# Altium PCB PCB1.PcbDoc
Units mil, origin at the board's own origin, x right, y up, seen from the top; angles counter-clockwise.
Board outline 3942.06 x 5904.05 mil, 2 copper layers (Top Layer, Bottom Layer); 24 components, 64 nets, 315 pads, 153 vias.
Unrouted connection lines stored in the file: 55.
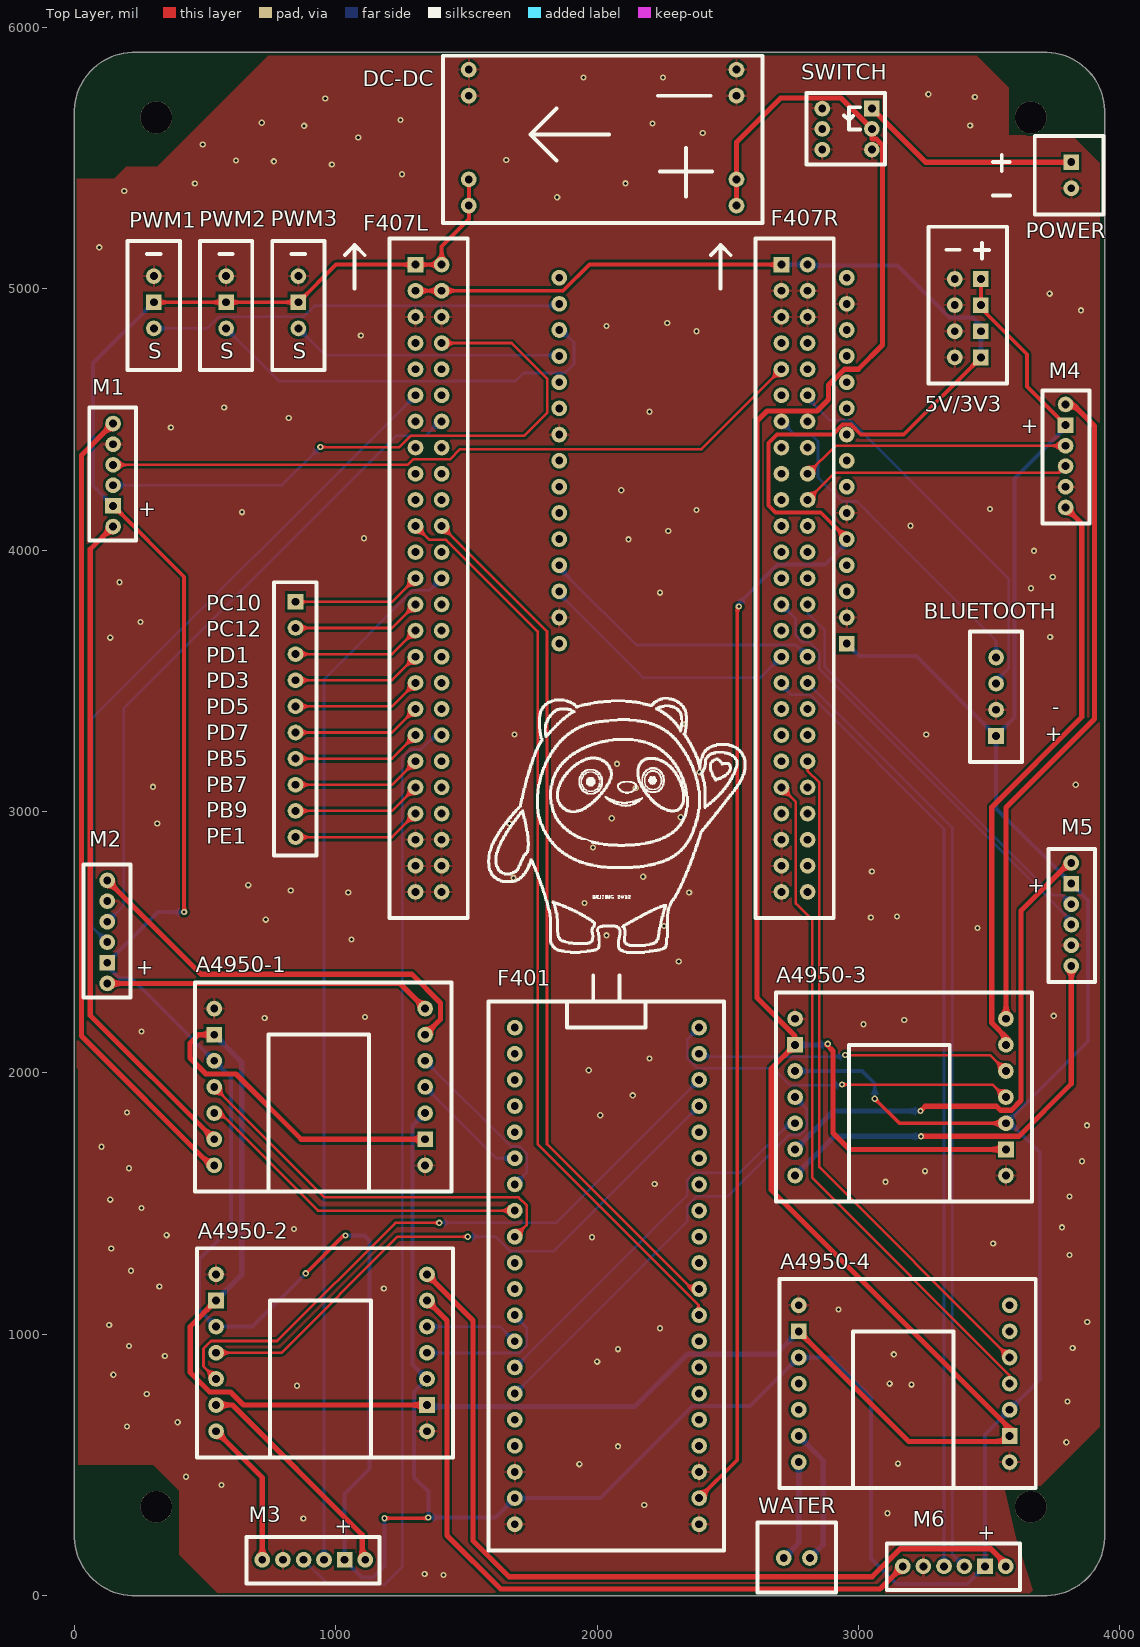
[diagram p0: Top Layer view]
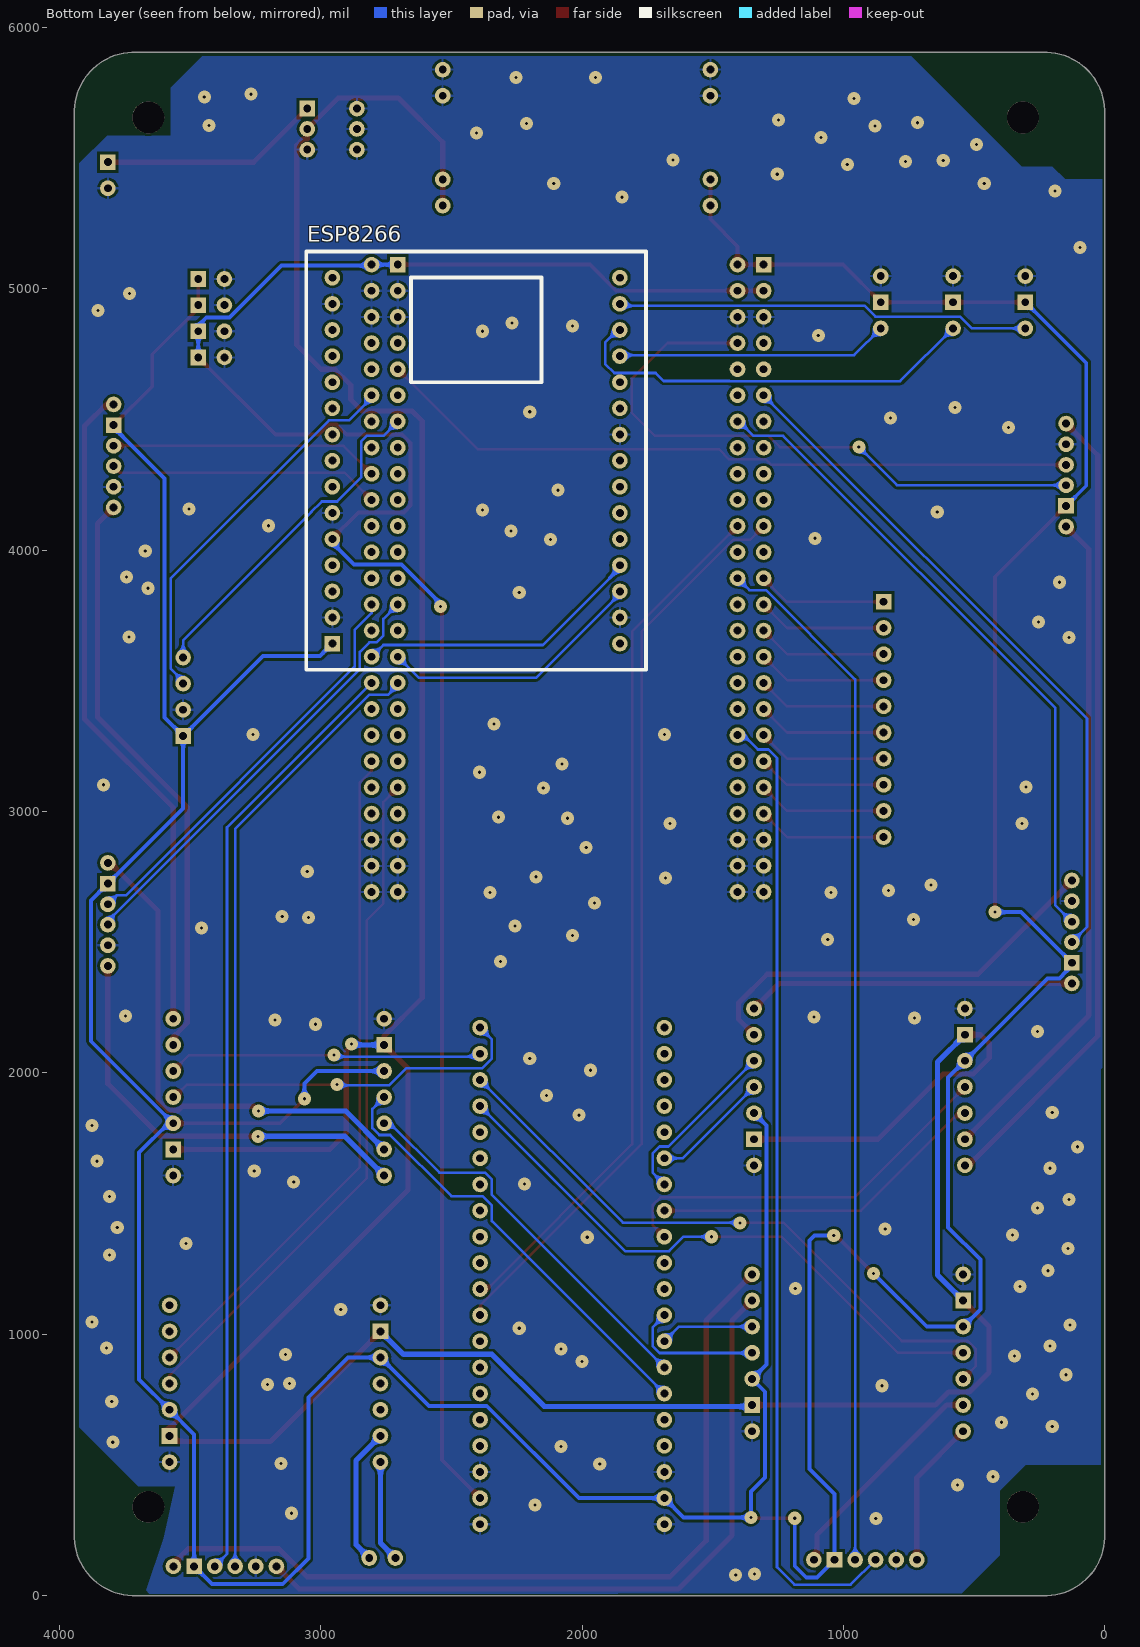
[diagram p1: Bottom Layer view, seen from below]

## Layer stack, top to bottom
Top Solder: solder mask 0.4, Solder Resist, Dk 3.5
Top Layer: signal copper 1.4
Dielectric 1: dielectric 12.6, FR-4, Dk 4.8
Bottom Layer: signal copper 1.4
Bottom Solder: solder mask 0.4, Solder Resist, Dk 3.5

## Board outline
220,0 cw(c228.5,228.5) 0,237 0,236.11 0,5684 cw(c228.5,5675.5) 237,5904 3722.01,5904 cw(c3713.51,5675.5) 3942.01,5667 3942.01,5666 3942.01,219 3942,220 cw(c3713.5,228.5) 3705,0

## Design rules (kind name [scope] priority, off if disabled: settings)
Clearance [All] p1: gap=10 ignorepadtopadclearanceinfootprint=FALSE except(0.25: Arc-Arc Arc-Track Arc-SMDPad Arc-THPad Arc-Via Arc-Text Arc-Hole Track-Track Track-SMDPad Track-THPad Track-Via Track-Text Track-Hole SMDPad-SMDPad SMDPad-THPad SMDPad-Via SMDPad-Text SMDPad-Hole THPad-THPad THPad-Via THPad-Text THPad-Hole Via-Via Via-Text Via-Hole Text-Text Text-Hole)
HoleSize [All] p1: absolutevalues=TRUE maxlimit=130 minlimit=1 maxpercent=80.000 minpercent=20.000
PolygonConnect [All] p1: thpad.connectstyle=Relief thpad.reliefconductorwidth=10 thpad.reliefentries=4 thpad.polygonreliefangle="90 Angle" thpad.airgapwidth=10 smdpad.connectstyle=Relief smdpad.reliefconductorwidth=10 smdpad.reliefentries=4 smdpad.polygonreliefangle="90 Angle" smdpad.airgapwidth=10 via.connectstyle=Direct via.reliefconductorwidth=10 via.reliefentries=4 via.polygonreliefangle="90 Angle" via.airgapwidth=10
RoutingVias [All] p1: holewidth=28 width=50 viastyle="Through Hole" minholewidth=28 minwidth=50 maxholewidth=28 maxwidth=50
SilkToSolderMaskClearance [IsPad] p1: minsilkscreentomaskgap=7 clearancetoexposedcopper=TRUE
SolderMaskExpansion [All] p1: expansion=4
Width Width_4 [All] p1: maxlimit=20 minlimit=10 preferedwidth=10
Width Width_3 [InNet('3V3')] p2: maxlimit=15 minlimit=10 preferedwidth=15
Width Width_2 [InNet('5V')] p3: maxlimit=15 minlimit=15 preferedwidth=15
Width Width_1 [InNet('12V')] p4: maxlimit=20 minlimit=10 preferedwidth=20
Width [InNet('12V_IN')] p5: maxlimit=20 minlimit=10 preferedwidth=20
28 further rules are at their usual default settings.

## Classes and differential pairs
component class Sheet1: DC-DC POWER SWITCH

## Components (designator, comment, footprint, x,y, rotation, side; value= is the part's Value field where it differs from the comment)
*1 "PIN_HEADER" PIN_HEADER -9460,-15590 r0 top
*2 "POWER_HEADER" POWER_HEADER 3468,5137 r0 top
A4950-1 "A4950" A4950 962,2191 r180 top (schematic designator *5)
A4950-2 "A4950" A4950 969,1174 r180 top (schematic designator *6)
A4950-3 "A4950" A4950 3184,2152 r180 top (schematic designator *7)
A4950-4 "A4950" A4950 3198,1056 r180 top (schematic designator *8)
BLUETOOTH "HC-06" HC-06 3718,3582 r180 top (schematic designator *11)
DC-DC "DC-DC" DC-DC 1902,5412 r180 top (schematic designator *9)
ESP8266 "ESP8266" ESP 1894,3008 r180 bottom (schematic designator *22)
F401 "STM32F401" STM32F401CCU6 2290,273 r0 top (schematic designator *21)
F407L "STM32F407左" STM32F407左 1305,3992 r0 top (schematic designator *19)
F407R "STM32F407右" STM32F407左 2705,3992 r0 top locked (schematic designator *18)
M1 "ENCODER1" ENCODER1 148,4090 r0 top (schematic designator *15)
M2 "ENCODER2" ENCODER1 126,2342 r0 top (schematic designator *16)
M3 "ENCODER3" ENCODER1 1113,137 r90 top (schematic designator *17)
M4 "ENCODER4" ENCODER2 3813,4155 r0 top (schematic designator *12)
M5 "ENCODER5" ENCODER2 3835,2401 r0 top (schematic designator *13)
M6 "ENCODER6" ENCODER2 3161,91 r270 top (schematic designator *14)
POWER "POWER" POWER 3814,5384 r0 top (schematic designator *10)
PWM1 "PWM1" PWM 1004,3548 r0 top (schematic designator *20)
PWM2 "PWM2" PWM 1280.5,3548 r0 top (schematic designator *23)
PWM3 "PWM3" PWM 1557,3548 r0 top (schematic designator *24)
SWITCH "SWITCH" SIWITCH 2951,5689 r0 top (schematic designator *3)
WATER "WATER_MOTER" WATER_HEADER 2814,144 r90 top (schematic designator *4)

## Footprints (in the part's own frame and the unit in brackets; to place one, negate y for a bottom-side part, rotate by r counter-clockwise, add the part's x,y. Pads: shape width x height; smd on the part's side, far side on the other; paste and mask are expansions set on the pad)
A4950 [mil]
  round 60 hole 30: 1(-380,545) 3(-380,345) 4(-380,245) 5(-380,145) 6(-380,45) 7(-380,-55) 8(427,545) 9(427,445) 10(427,345) 11(427,245) 12(427,145) 14(427,-55)
  rect 60x60 hole 30: 2(-380,445) 13(427,45)
  silkscreen extent -480,-155 500,645
DC-DC [mil]
  round 60 hole 30: 1(-631,-426) 2(-631,-326) 3(-631,-6) 4(-631,94) 5(393,-426) 6(393,-326) 7(393,-6) 8(393,94)
  silkscreen extent -731,-479 492,160
ENCODER1 [mil]
  round 60 hole 30: 1(0,394) 2(0,315) 3(0,236) 4(0,158) 6(0,0)
  rect 60x60 hole 30: 5(0,79)
  silkscreen extent -91,-54 88,455
ENCODER2 [mil]
  round 60 hole 30: 1(-21,8) 2(-21,87) 3(-21,166) 4(-21,244) 6(-21,402)
  rect 60x60 hole 30: 5(-21,323)
  silkscreen extent -109,-53 70,456
ESP [mil]
  round 60 hole 30: 1(-1061,2034) 2(-1061,1934) 3(-1061,1834) 4(-1061,1734) 5(-1061,1634) 6(-1061,1534) 7(-1061,1434) 8(-1061,1334) 9(-1061,1234) 10(-1061,1134) 11(-1061,1034) 12(-1061,934) 13(-1061,834) 14(-1061,734) 16(39,2034) 17(39,1934) 18(39,1834) 19(39,1734) 20(39,1634) 21(39,1534) 22(39,1434) 23(39,1334) 24(39,1234) 25(39,1134) 26(39,1034) 27(39,934) 28(39,834) 29(39,734) 30(39,634)
  rect 60x60 hole 30: 15(-1061,634)
  silkscreen extent -1161,534 139,2134
HC-06 [mil]
  round 60 hole 30: 1(192,-7) 2(192,93) 3(192,193)
  rect 60x60 hole 30: 4(192,293)
  silkscreen extent 92,-107 292,393
PIN_HEADER [mil]
  rect 60x60 hole 30: 1(10306,19392)
  round 60 hole 30: 2(10306,19292) 3(10306,19192) 4(10306,19092) 5(10306,18992) 6(10306,18892) 7(10306,18792) 8(10306,18692) 9(10306,18592) 10(10306,18492)
  silkscreen extent 10224,18422 10386,19467
POWER [mil]
  rect 60x60 hole 30: 1(0,100)
  round 60 hole 30: 2(0,0)
  silkscreen extent -300,-100 123,200
POWER_HEADER [mil]
  rect 60x60 hole 30: 1(0,-100) 2(0,-200) 3(0,-300) 4(0,-400)
  round 60 hole 30: 5(-100,-100) 6(-100,-200) 7(-100,-300) 8(-100,-400)
  silkscreen extent -200,-500 100,100
PWM [mil]
  round 60 hole 30: 1(-700,1500) 3(-700,1300)
  rect 60x60 hole 30: 2(-700,1400)
  silkscreen extent -800,1141 -600,1634
SIWITCH [mil]
  rect 60x60 hole 30: 1(100,0)
  round 60 hole 30: 2(100,-78) 3(100,-157) 4(-90,0) 5(-90,-78) 6(-90,-157)
  silkscreen extent -150,-214 150,60
STM32F401CCU6 [mil]
  round 60 hole 30: 1(-605,1900) 2(-605,1800) 3(-605,1700) 4(-605,1600) 5(-605,1500) 6(-605,1400) 7(-605,1300) 8(-605,1200) 9(-605,1100) 10(-605,1000) 11(-605,900) 12(-605,800) 13(-605,700) 14(-605,600) 15(-605,500) 16(-605,400) 17(-605,300) 18(-605,200) 19(-605,100) 20(-605,0) 21(100,1900) 22(100,1800) 23(100,1700) 24(100,1600) 25(100,1500) 26(100,1400) 27(100,1300) 28(100,1200) 29(100,1100) 30(100,1000) 31(100,900) 32(100,800) 33(100,700) 34(100,600) 35(100,500) 36(100,400) 37(100,300) 38(100,200) 39(100,100) 40(100,0)
  silkscreen extent -705,-100 195,2100
STM32F407左 [mil]
  rect 60x60 hole 30: 1(0,1100)
  round 60 hole 30: 2(0,1000) 3(0,900) 4(0,800) 5(0,700) 6(0,600) 7(0,500) 8(0,400) 9(0,300) 10(0,200) 11(0,100) 12(0,0) 13(0,-100) 14(0,-200) 15(0,-300) 16(0,-400) 17(0,-500) 18(0,-600) 19(0,-700) 20(0,-800) 21(0,-900) 22(0,-1000) 23(100,1100) 24(100,1000) 25(100,900) 26(100,800) 27(100,700) 28(100,600) 29(100,500) 30(100,400) 31(100,300) 32(100,200) 33(100,100) 34(100,0) 35(100,-100) 36(100,-200) 37(100,-300) 38(100,-400) 39(100,-500) 40(100,-600) 41(100,-700) 42(100,-800) 43(100,-900) 44(100,-1000) 45(0,-1100) 46(0,-1200) 47(0,-1300) 48(100,-1100) 49(100,-1200) 50(100,-1300)
  silkscreen extent -270,-1400 200,1200
WATER_HEADER [mil]
  round 60 hole 30: 1(0,100) 2(0,0)
  silkscreen extent -132,-100 135,200

## Free pads (board coordinates)
  round 122 hole 122: 75(313,340) 75(313,5655) 75(3659,340) 75(3659,5655)

## Via types
v1: diameter 24/50 (per signal layer), hole 12, Top Layer to Bottom Layer, 153 vias

## Nets (pads, with @x,y where several pads share a name; then routed paths per layer and width w, separated by ;. In a path a pad name is that pad's centre, name@x,y a point inside that pad or via, vN(x,y) a via of type N, cw(c..) or ccw(c..) an arc to the next point about the centre after c; other vN are vias at no path point)
3V3: *2.3 *2.4 ESP8266.11 F401.39 F407L.2 F407L.24 F407R.1 F407R.23 | length 7991
  Top Layer w15: F407L.2 F407L.24 1870,4992 1970,5092 F407R.1 ; F401.39 2536,519 v1@2536,3784 ; ESP8266.11@2964,4036 2855.5,4144.5 2681.5,4144.5 2656,4170 2656,4410.18 2687.82,4442 2901.61,4442 2939.36,4479.75 2970.64,4479.75 3008.39,4442 3173,4442 *2.4
  Bottom Layer w15: v1@2534,3788.18 2690.32,3944.5 2872.5,3944.5 ESP8266.11@2951,4023 ; F407R.1 F407R.23 2809,5088 3149.82,5088 3348.32,4889.5 3437.5,4889.5 3468,4859 *2.3 *2.4
  other v1: 2542,3784
5V: *2.1 *2.2 A4950-1.3 A4950-1.12 A4950-2.3 A4950-2.12 A4950-3.3 A4950-3.12 A4950-4.3 A4950-4.12 BLUETOOTH.4 DC-DC.7 DC-DC.8 ESP8266.15 F401.19 F407L.1 F407L.23 M1.5 M2.5 M3.5 M4.5 M5.5 M6.5 PWM1.2 PWM2.2 PWM3.2 | length 20760.1
  Top Layer w15: M1.5 149,4169 420,3898 v1(420,2615) ; PWM1.2 PWM2.2 PWM3.2 1001,5092 F407L.1 F407L.23 1405,5162 1509,5266 DC-DC.8 DC-DC.7 ; v1(885,1233) v1@1027,1375 ; v1(1186,296) 1351,296 v1(1354,299) ; A4950-1.3 A4950-1.3@1345.5,1842.5 ; v1(3062,1901) 3156,1807 A4950-3.3 ; *2.1 *2.2 3462,4931 3644,4749 3644,4626 M4.5
  Bottom Layer w15: M2.5 126,2408 144.5,2389.5 145.68,2389.5 173.5,2361.68 219.32,2361.68 A4950-1.12 599,1982 599,1409 476,1286 476,1095 A4950-2.12 681,1029 v1(885,1233) ; M2.5@127,2422 320,2615 v1(420,2615) ; M1.5 71,4246 71,4715 PWM1.2 ; v1(1037,1378) 1110,1378 1129,1359 1129,484 1034,389 M3.5 1101,70 1142,70 1186,114 v1(1186,296) v1@1182,296 ; A4950-1.3 1294,1798 1294,884 A4950-2.3 1300,780 1300,452 1354,398 v1(1354,299) 1611,299 F401.19 ; F401.19@1675,383 F401.19 ; A4950-3.12 3014,2007 3062,1959 v1(3062,1901) ; ESP8266.15 3003,3594 3221,3594 BLUETOOTH.4 ; M4.5@3792,4498 M4.5 3792,4469 3596.5,4273.5 3596.5,3359.5 BLUETOOTH.4 ; F401.19 2012,373 2364.5,725.5 2585.5,725.5 A4950-4.12 2895,911 3047,759 3047,142 3145,44 3416,44 M6.5 3484,617 A4950-4.3 3694,827 3694,1695 3582,1807 A4950-3.3 3878,2121 3878,2660 M5.5 3526,3012 BLUETOOTH.4
12V: A4950-1.2 A4950-1.13 A4950-2.2 A4950-2.13 A4950-3.2 A4950-3.13 A4950-4.2 A4950-4.13 DC-DC.3 DC-DC.4 SWITCH.2 | length 13965.3
  Top Layer w20: A4950-1.13 475,2146 442,2113 442,2057 503,1996 618,1996 868,1746 A4950-1.2 ; A4950-2.13 443,1030 443,854 518,779 597.43,779 647.43,729 A4950-2.2 ; DC-DC.4 DC-DC.3 2533,5560 2702.25,5729.25 2932.75,5729.25 SWITCH.2 3051,5572.25 3067.67,5572.25 3091.25,5548.67 3091.25,4784.25 2999,4692 2946,4692 2885,4631 2885,4576 2841.25,4532.25 2650,4532.25 2611,4493.25 2611,2287 2757,2141 A4950-3.13 2666,2016 2666,1552.29 3578,640.29 A4950-4.2 3550,590 3192,590 A4950-4.13 ; v1@2878.5,2107.5 2902,2084 2902,1770 2965,1707 A4950-3.2
  Bottom Layer w20: A4950-1.13 640,2041 640,1227 A4950-2.13 ; A4950-2.2 1355,723 2144,723 2344,923 2683,923 A4950-4.13 ; A4950-3.13 v1@2865,2107
  other v1: 2882,2111
12V_IN: POWER.1 SWITCH.1 | length 847.9
  Top Layer w20: SWITCH.1 3256,5484 POWER.1
401R: F401.31 F407L.33 | length 3343.4
  Top Layer w10: F407L.33 1808,3689 1808,1727 2362,1173 F401.31
401T: F401.32 F407L.11 | length 3515.1
  Top Layer w10: F407L.11 1358,4039 1422,4039 1772,3689 1772,1727.36 2388,1111.36 F401.32@2388,1063
EN1A: F407L.26 M1.4 | length 2366.9
  Top Layer w10: v1(941,4394) 1243.36,4394 1286.36,4437 1721,4437 1809,4525 1809,4655.62 1672.62,4792 F407L.26
  Bottom Layer w10: M1.4 795,4248 v1(941,4394)
EN1B: F407R.5 M1.3 | length 2708.6
  Top Layer w10: M1.3 1275.36,4326 1296.36,4347 1437,4347 1476,4386 2399,4386 F407R.5
EN2A: F407L.6 M2.4 | length 2628.4
  Bottom Layer w10: M2.4 68,2558 68,3355 F407L.6
EN2B: F407L.29 M2.3 | length 2495.2
  Bottom Layer w10: M2.3 189,2641 189,3395 1231,4437 1343,4437 F407L.29@1390,4484
EN3A: F407L.35 M3.4 | length 3978.7
  Bottom Layer w10: M3.4 955,3505.64 1296.36,3847 1360,3847 F407L.35
EN3B: F407L.41 M3.3 | length 3735.2
  Bottom Layer w10: M3.3 972,42 1187,42 1254,109 1254,2667.36 1254,3204.64 1286.36,3237 1327,3237 1392,3302 1395,3302 F407L.41
EN4A: F407R.31 M4.4 | length 1031.3
  Top Layer w10: F407R.31 2912,4399 M4.4
EN4B: F407R.32 M4.3 | length 1040.4
  Top Layer w10: F407R.32 2909,4296 3767,4296 M4.3
EN5A: F407R.36 M5.4 | length 1585.7
  Bottom Layer w10: F407R.36 2805,3759 2870,3694 2870,3553.64 3744.64,2679 3780,2679 M5.4
EN5B: F407R.14 M5.3 | length 1700.3
  Bottom Layer w10: F407R.14 2760,3737 2760,3673.36 2786.36,3647 2813.64,3647 2850,3610.64 2850,3545.36 3814,2581.36 M5.3
EN6A: F407R.39 M6.4 | length 3628.5
  Bottom Layer w10: F407R.39 3358,2939 3358,159 M6.4
EN6B: F407R.17 M6.3 | length 3680.2
  Bottom Layer w10: F407R.17 2705,3483 2741,3447 2813.64,3447 3327,2933.64 M6.3
ESPR: ESP8266.27 F407R.38 | length 1100.8
  Bottom Layer w10: 1893,3894 2150,3637 2760,3637 F407R.38
  Bottom Layer w15: ESP8266.27 1855,3932 1893,3894
ESPT: ESP8266.28 F407R.16 | length 1025.7
  Bottom Layer w10: ESP8266.28 1855,3832 2175,3512 2625,3512 F407R.16
GND: *2.5 *2.6 *2.7 *2.8 A4950-1.1 A4950-1.14 A4950-2.1 A4950-2.14 A4950-3.1 A4950-3.14 A4950-4.1 A4950-4.14 BLUETOOTH.3 DC-DC.1 DC-DC.2 DC-DC.5 DC-DC.6 ESP8266.2 ESP8266.10 ESP8266.14 ESP8266.22 ESP8266.29 F401.18 F401.20 F401.38 F401.40 F407L.3 F407L.25 F407L.45 F407L.46 F407L.47 F407L.48 F407L.49 F407L.50 F407R.2 F407R.3 F407R.24 F407R.25 F407R.45 F407R.46 F407R.47 F407R.48 F407R.49 F407R.50 M1.2 M2.2 M3.2 M4.2 M5.2 M6.2 POWER.2 PWM1.1 PWM2.1 PWM3.1 SWITCH.3 SWITCH.4 SWITCH.5 SWITCH.6
  other v1: 1412,79 1340,83 876,295 3111,315 2180,347 563,423 427,455 1932,503 3151,505 2080,571 3795,587 201,647 395,663 3799,743 277,771 852,803 3203,807 3119,811 149,845 2000,895 346,917 3135,923 2080,943 3819,947 209,955 2240,1023 133,1035 3875,1047 2923,1095 1184,1175 325,1183 217,1243 3807,1303 141,1328 3515,1347 1980,1371 353,1379 840,1403 3778,1409 257,1483 137,1515 3807,1527 2220,1575 3103,1583 3254,1624 209,1635 3855,1662 104,1717 3874,1799 2012,1838 201,1848 2136,1914 1968,2010 2200,2055 257,2158 3019,2186 3175,2202 728,2210 1112,2214 3747,2218 2312,2426 1060,2510 2036,2526 3455,2554 2256,2562 732,2586 3047,2594 3147,2598 1952,2650 1048,2690 2352,2690 828,2698 665,2718 1680,2746 2176,2750 3051,2770 1984,2862 317,2954 1664,2954 2056,2974 2320,2978 2148,3090 301,3094 3831,3102 2392,3150 2076,3182 1684,3294 3259,3294 2336,3334 137,3665 3733,3667 253,3725 2240,3837 3660,3854 173,3877 3743,3897 3671,3997 2120,4041 1108,4045 2272,4073 3199,4093 641,4145 2380,4153 3503,4157 2092,4229 369,4469 820,4505 2200,4529 573,4545 1096,4821 2380,4837 2036,4857 2268,4869 3851,4917 3731,4981 95,5158 1847,5350 191,5374 461,5402 2108,5403 1253,5438 985,5475 763,5487 618,5490 1652,5492 491,5552 1086,5578 2404,5596 879,5623 3427,5624 2212,5632 717,5635 1248,5645 960,5728 3445,5733 3267,5744 1948,5808 2252,5808
H1: *1.1 F407L.13 | length 496.3
  Top Layer w10: *1.1 1215,3802 F407L.13
H2: *1.2 F407L.14 | length 496.3
  Top Layer w10: *1.2 1215,3702 F407L.14
H3: *1.3 F407L.15 | length 496.3
  Top Layer w10: *1.3 1215,3602 F407L.15
H4: *1.4 F407L.16 | length 496.3
  Top Layer w10: *1.4 1215,3502 F407L.16
H5: *1.5 F407L.17 | length 496.3
  Top Layer w10: *1.5 1215,3402 F407L.17
H6: *1.6 F407L.18 | length 496.3
  Top Layer w10: *1.6 1215,3302 F407L.18
H7: *1.7 F407L.19 | length 496.3
  Top Layer w10: *1.7 1215,3202 F407L.19
H8: *1.8 F407L.20 | length 496.3
  Top Layer w10: *1.8 1215,3102 F407L.20
H9: *1.9 F407L.21 | length 496.3
  Top Layer w10: *1.9 1215,3002 F407L.21
H10: *1.10 F407L.22 | length 496.3
  Top Layer w10: *1.10 1215,2902 F407L.22
HR: BLUETOOTH.1 F407R.7 | length 1319
  Bottom Layer w10: F407R.7 2760,4437 2823.64,4437 2845,4415.64 2845,4278 2937,4186 2995,4186 3038,4143 ; 3034,4146 3526,3654 BLUETOOTH.1
HT: BLUETOOTH.2 F407R.28 | length 1500.9
  Bottom Layer w10: F407R.28 2805,4582 2891,4496 2968.64,4496 3574,3890.64 3574,3547 BLUETOOTH.2@3521,3494 ; BLUETOOTH.2@3514,3487 BLUETOOTH.2@3521,3494 ; BLUETOOTH.2 BLUETOOTH.2@3521,3494
M11: A4950-1.4 F401.6 | length 456.1
  Bottom Layer w10: A4950-1.4 1615,1673 F401.6
M12: A4950-1.5 F401.7 | length 672.1
  Bottom Layer w10: A4950-1.5 1670,1718 1703.64,1718 1730,1691.64 1730,1618 F401.7
M21: A4950-1.10 F401.8 | length 1304.5
  Top Layer w10: A4950-1.10 559,1846 932,1473 F401.8
M22: A4950-1.11 F401.9 | length 1521.9
  Top Layer w10: A4950-1.11 957,1524 1700,1524 1730,1494 1730,1418 F401.9
M31: A4950-2.4 F401.12 | length 530.2
  Bottom Layer w10: A4950-2.4 1349,928 1703.64,928 1730,954.36 1730,1026 1685,1071 F401.12
M32: A4950-2.5 F401.13 | length 359.2
  Bottom Layer w10: A4950-2.5 1629,1029 F401.13
M41: A4950-3.10 F401.14 | length 1493.2
  Bottom Layer w10: F401.14 2345,1533 2345,1591.64 2371.36,1618 2546,1618 2735,1807 A4950-3.10
M42: A4950-3.11 F401.15 | length 1709.2
  Bottom Layer w10: F401.15 2345,1433 2345,1491.64 2381.36,1528 2500,1528 2734,1762 2775.64,1762 2802,1788.36 2802,1862 A4950-3.11
M51: A4950-3.4 F401.21 | length 1410.2
  Top Layer w10: v1(2937,1955) 3512,1955 A4950-3.4@3554,1913
  Bottom Layer w10: F401.21 2345,2128 2345,2054.36 2381.36,2018 2672.36,2018 2738.36,1952 2938,1952 v1(2937,1955)
M52: A4950-3.5 F401.22 | length 1204.7
  Top Layer w10: v1(2949,2068) 3503,2068 A4950-3.5
  Bottom Layer w10: F401.22 2401,2062 2929,2062 v1(2949,2068)
M61: A4950-2.10 F401.23 | length 2451.1
  Top Layer w10: A4950-2.10 494,877 494,944.64 523.36,974 776,974 1228,1426 v1(1396,1426)
  Bottom Layer w10: v1@1402,1427 1844,1427 F401.23
M62: A4950-2.11 F401.24 | length 2284.6
  Top Layer w10: A4950-2.11 792,929 1236,1373 v1(1505,1373)
  Bottom Layer w10: v1(1505,1373) 1611.36,1373 1666.36,1318 1835,1318 F401.24
MO11: A4950-1.8 M1.1 | length 3106.2
  Top Layer w20: M1.1 27,4363 27,2141 522,1646 A4950-1.8
MO12: A4950-1.9 M1.6 | length 2576.4
  Top Layer w20: M1.6 61,4003 61,2220 A4950-1.9
MO21: A4950-1.6 M2.1 | length 1614.7
  Top Layer w20: M2.1 485,2377 1291,2377 1401,2267 1401,2205 A4950-1.6
MO22: A4950-1.7 M2.6 | length 1255.8
  Top Layer w20: M2.6 1246,2342 A4950-1.7
MO31: A4950-2.8 M3.1 | length 565.3
  Top Layer w20: A4950-2.8 719,452 M3.1
MO32: A4950-2.9 M3.6 | length 886.4
  Top Layer w10: M3.6@1101,149 M3.6
  Top Layer w20: A4950-2.9 605,729 1101,233 M3.6@1101,149 ; M3.6 M3.6@1113,158
MO41: A4950-3.6 M4.1 | length 2246.5
  Top Layer w20: A4950-3.6 3564,2136.29 3510,2190.29 3510,3017 3854,3361 3854,4101 M4.1
MO42: A4950-3.7 M4.6 | length 2552.8
  Top Layer w20: A4950-3.7 3564,3015 3903,3354 3903,4474 3820,4557 M4.6
MO51: A4950-3.8 M5.1 | length 1653.4
  Top Layer w20: v1(3239,1757) 3613,1757 3814,1958 M5.1
  Bottom Layer w20: A4950-3.8 2907,1757 v1(3239,1757)
MO52: A4950-3.9 M5.6 | length 1948.7
  Top Layer w20: v1(3237,1854) 3255,1872 3528.29,1872 3543.29,1857 3584.71,1857 3622,1894.29 3622,2620.28 3804.72,2803 M5.6
  Bottom Layer w20: A4950-3.9 2904,1854 v1(3237,1854)
MO61: A4950-2.6 M6.1 | length 2794.8
  Top Layer w20: A4950-2.6 1426,1052 1426,230 1631,25 3082,25 M6.1
MO62: A4950-2.7 M6.6 | length 3269.9
  Top Layer w20: A4950-2.7 1525,1053 1525,210 1663,72 3052,72 3159,179 3507,179 3567.61,118.39 M6.6@3567.61,109.61
PWM1: ESP8266.17 PWM1.3 | length 1589.9
  Bottom Layer w10: PWM1.3 508,4848 553,4893 877,4893 918,4934 1847,4934 ESP8266.17
PWM2: ESP8266.18 PWM2.3 | length 1593.8
  Bottom Layer w10: PWM2.3 782.5,4646 1438,4646 1437,4647 1688,4647 1718.25,4677.25 1876.25,4677.25 1911.5,4712.5 1911.5,4793.5 ESP8266.18@1863,4842
PWM3: ESP8266.19 PWM3.3 | length 1039
  Bottom Layer w10: PWM3.3 959,4746 1841,4746 ESP8266.19@1850,4737
WATER1: A4950-4.4 F407R.21 | length 2642.6
  Top Layer w10: F407R.21 2760,3037 2760,2647 2823,2584 2823,1598 3578,843 A4950-4.4
WATER2: A4950-4.5 F407R.42 | length 2601.2
  Top Layer w10: F407R.42 2805,3155.64 2850,3110.64 2850,1639 A4950-4.5
WATERO1: A4950-4.8 WATER.1 | length 390.6
  Bottom Layer w20: WATER.1 2771,201 A4950-4.8
WATERO2: A4950-4.9 WATER.2 | length 527.1
  Bottom Layer w20: A4950-4.9 2865,517 2865,195 WATER.2
pads on no net: A4950-4.6 A4950-4.7 A4950-4.10 A4950-4.11 ESP8266.1 ESP8266.3 ESP8266.4 ESP8266.5 ESP8266.6 ESP8266.7 ESP8266.8 ESP8266.9 ESP8266.12 ESP8266.13 ESP8266.16 ESP8266.20 ESP8266.21 ESP8266.23 ESP8266.24 ESP8266.25 ESP8266.26 ESP8266.30 F401.1 F401.2 F401.3 F401.4 F401.5 F401.10 F401.11 F401.16 F401.17 F401.25 F401.26 F401.27 F401.28 F401.29 F401.30 F401.33 F401.34 F401.35 F401.36 F401.37 F407L.4 F407L.5 F407L.7 F407L.8 F407L.9 F407L.10 F407L.12 F407L.27 F407L.28 F407L.30 F407L.31 F407L.32 F407L.34 F407L.36 F407L.37 F407L.38 F407L.39 F407L.40 F407L.42 F407L.43 F407L.44 F407R.4 F407R.6 F407R.8 F407R.9 F407R.10 F407R.11 F407R.12 F407R.13 F407R.15 F407R.18 F407R.19 F407R.20 F407R.22 F407R.26 F407R.27 F407R.29 F407R.30 F407R.33 F407R.34 F407R.35 F407R.37 F407R.40 F407R.41 F407R.43 F407R.44

## Polygon pours and split planes (outlines as drawn)
GND on Top Layer "Top Layer-GND" (solid, remove dead copper, pour order 36): 201,5467 317,5467 741,5891 3452,5891 3574,5769 3574,5587 3816,5587 3923,5480 3923,646 3697,420 3556,420 3601,221 3667,21 3655,9 1864,9 1862,11 547,11 402,156 402,401 302,501 15,501 15,2014 9,2020 9,2057 10,2058 10,5420 152,5420 200,5468
no net on Top Layer "Top Layer-No Net 1" (solid, pour order 32): 115,5481
no net on Top Layer "Top Layer-No Net 2" (solid, pour order 30): 126,5485
no net on Top Layer "Top Layer-No Net" (solid, pour order 4): -12,28
GND on Bottom Layer "Bottom Layer-GND" (solid, remove dead copper, pour order 34): 201,5466 317,5466 741,5890 3452,5890 3574,5768 3574,5586 3816,5586 3923,5479 3923,645 3697,419 3556,419 3601,220 3667,20 3655,8 1864,8 1862,10 547,10 402,155 402,401 303,500 15,500 15,2013 9,2019 9,2056 10,2057 10,5419 152,5419 200,5467
no net on Bottom Layer "Bottom Layer-No Net 1" (solid, pour order 26): 495,5890
no net on Bottom Layer "Bottom Layer-No Net" (solid, pour order 16): -21,5898

## Silkscreen, mask and mechanical layers (free items; w line width, h text height)
Top Overlay:
  drawing of 3503 lines, arcs and shapes, not listed
  text "5V/3V3" at 3254,4529 h60
Mechanical 1:
  lines w10: 0,236.11 0,5684 cw(c228.5,5675.5) 237,5904 3722.01,5904 cw(c3713.51,5675.5) 3942.01,5667 ; 0,237 ccw(c228.5,228.5) 220,0 3705,0 ccw(c3713.5,228.5) 3942,220 ; 3942.01,219 3942.01,5666

## Text inside footprints (layer, text, board x,y; h text height)
*1: Top Overlay "PC10" at 504,3768 h60; Top Overlay "PC12" at 504,3668.89 h60; Top Overlay "PD1" at 504,3569.78 h60; Top Overlay "PD3" at 504,3470.67 h60; Top Overlay "PD5" at 504,3371.56 h60; Top Overlay "PD7" at 504,3272.44 h60; Top Overlay "PB5" at 504,3173.33 h60; Top Overlay "PB9" at 504,2975.11 h60; Top Overlay "PE1" at 504,2876 h60; Top Overlay "PB7" at 504,3074.22 h60
BLUETOOTH: Top Overlay "+" at 3781,3321 h60 r180; Top Overlay "-" at 3769,3416 h60 r180
M1: Top Overlay "+" at 313,4130 h60
M2: Top Overlay "+" at 304,2376 h60
M3: Top Overlay "+" at 1056,298 h60 r90
M4: Top Overlay "+" at 3621,4499 h60 r180
M5: Top Overlay "+" at 3645,2740 h60 r180
M6: Top Overlay "+" at 3515,273 h60 r90
PWM1: Top Overlay "S" at 282,4731 h60
PWM2: Top Overlay "S" at 558.5,4731 h60
PWM3: Top Overlay "S" at 835,4731 h60